# Altium PCB Integrated LED.PcbDoc
Units mm, origin at the board's own origin, x right, y up, seen from the top; angles counter-clockwise.
Board outline 76.2 x 101.6 mm, 4 copper layers (Top Layer, Internal Plane 1, Internal Plane 2, Bottom Layer); 20 components, 30 nets, 85 pads, 11 vias.
Unrouted connection lines stored in the file: 11.
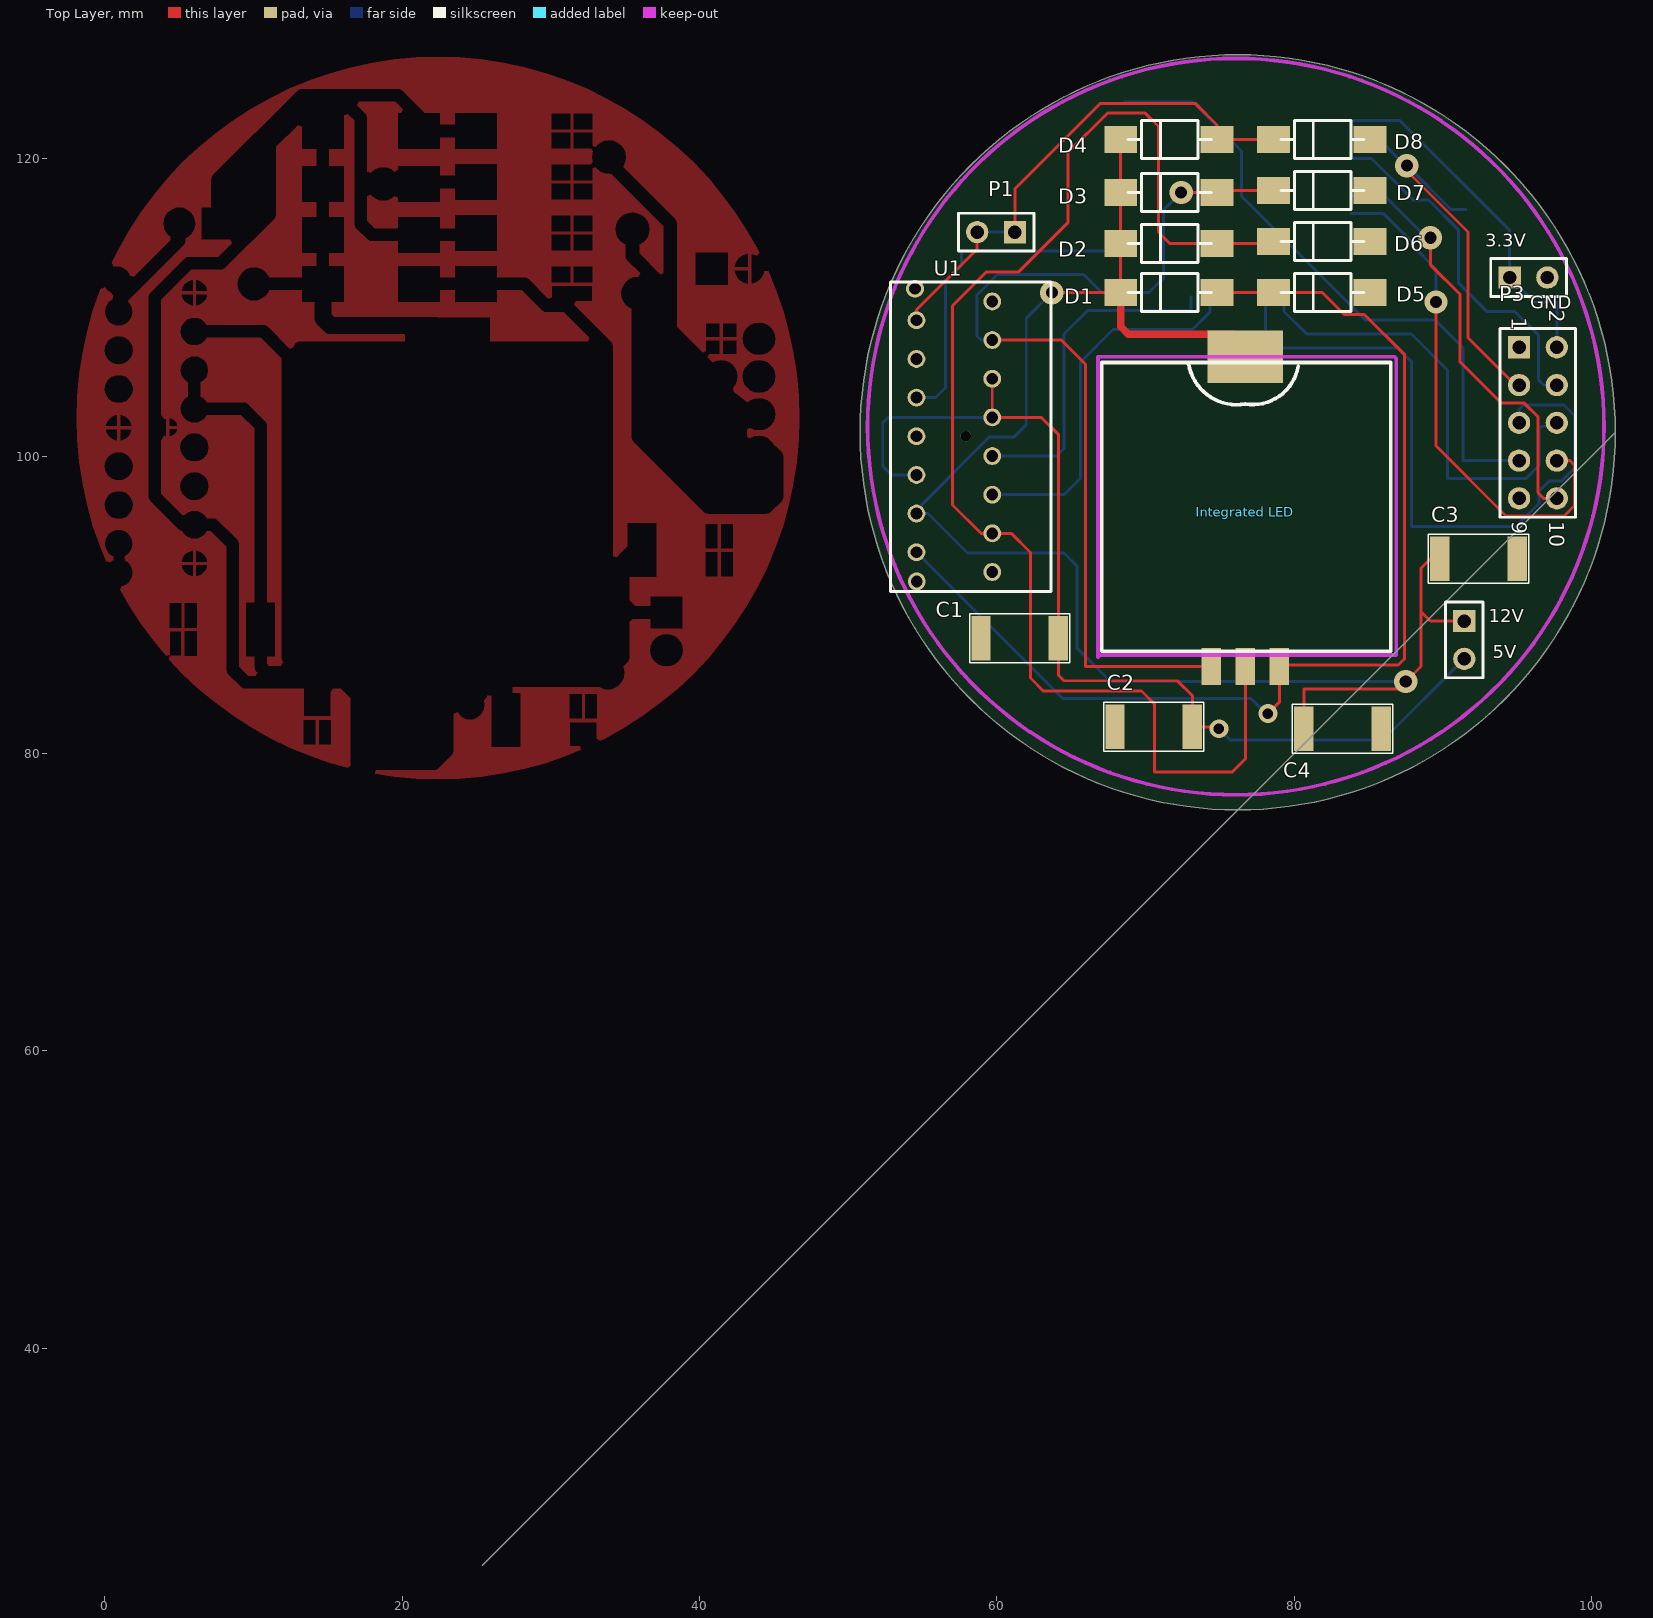
[diagram p0: Top Layer view]
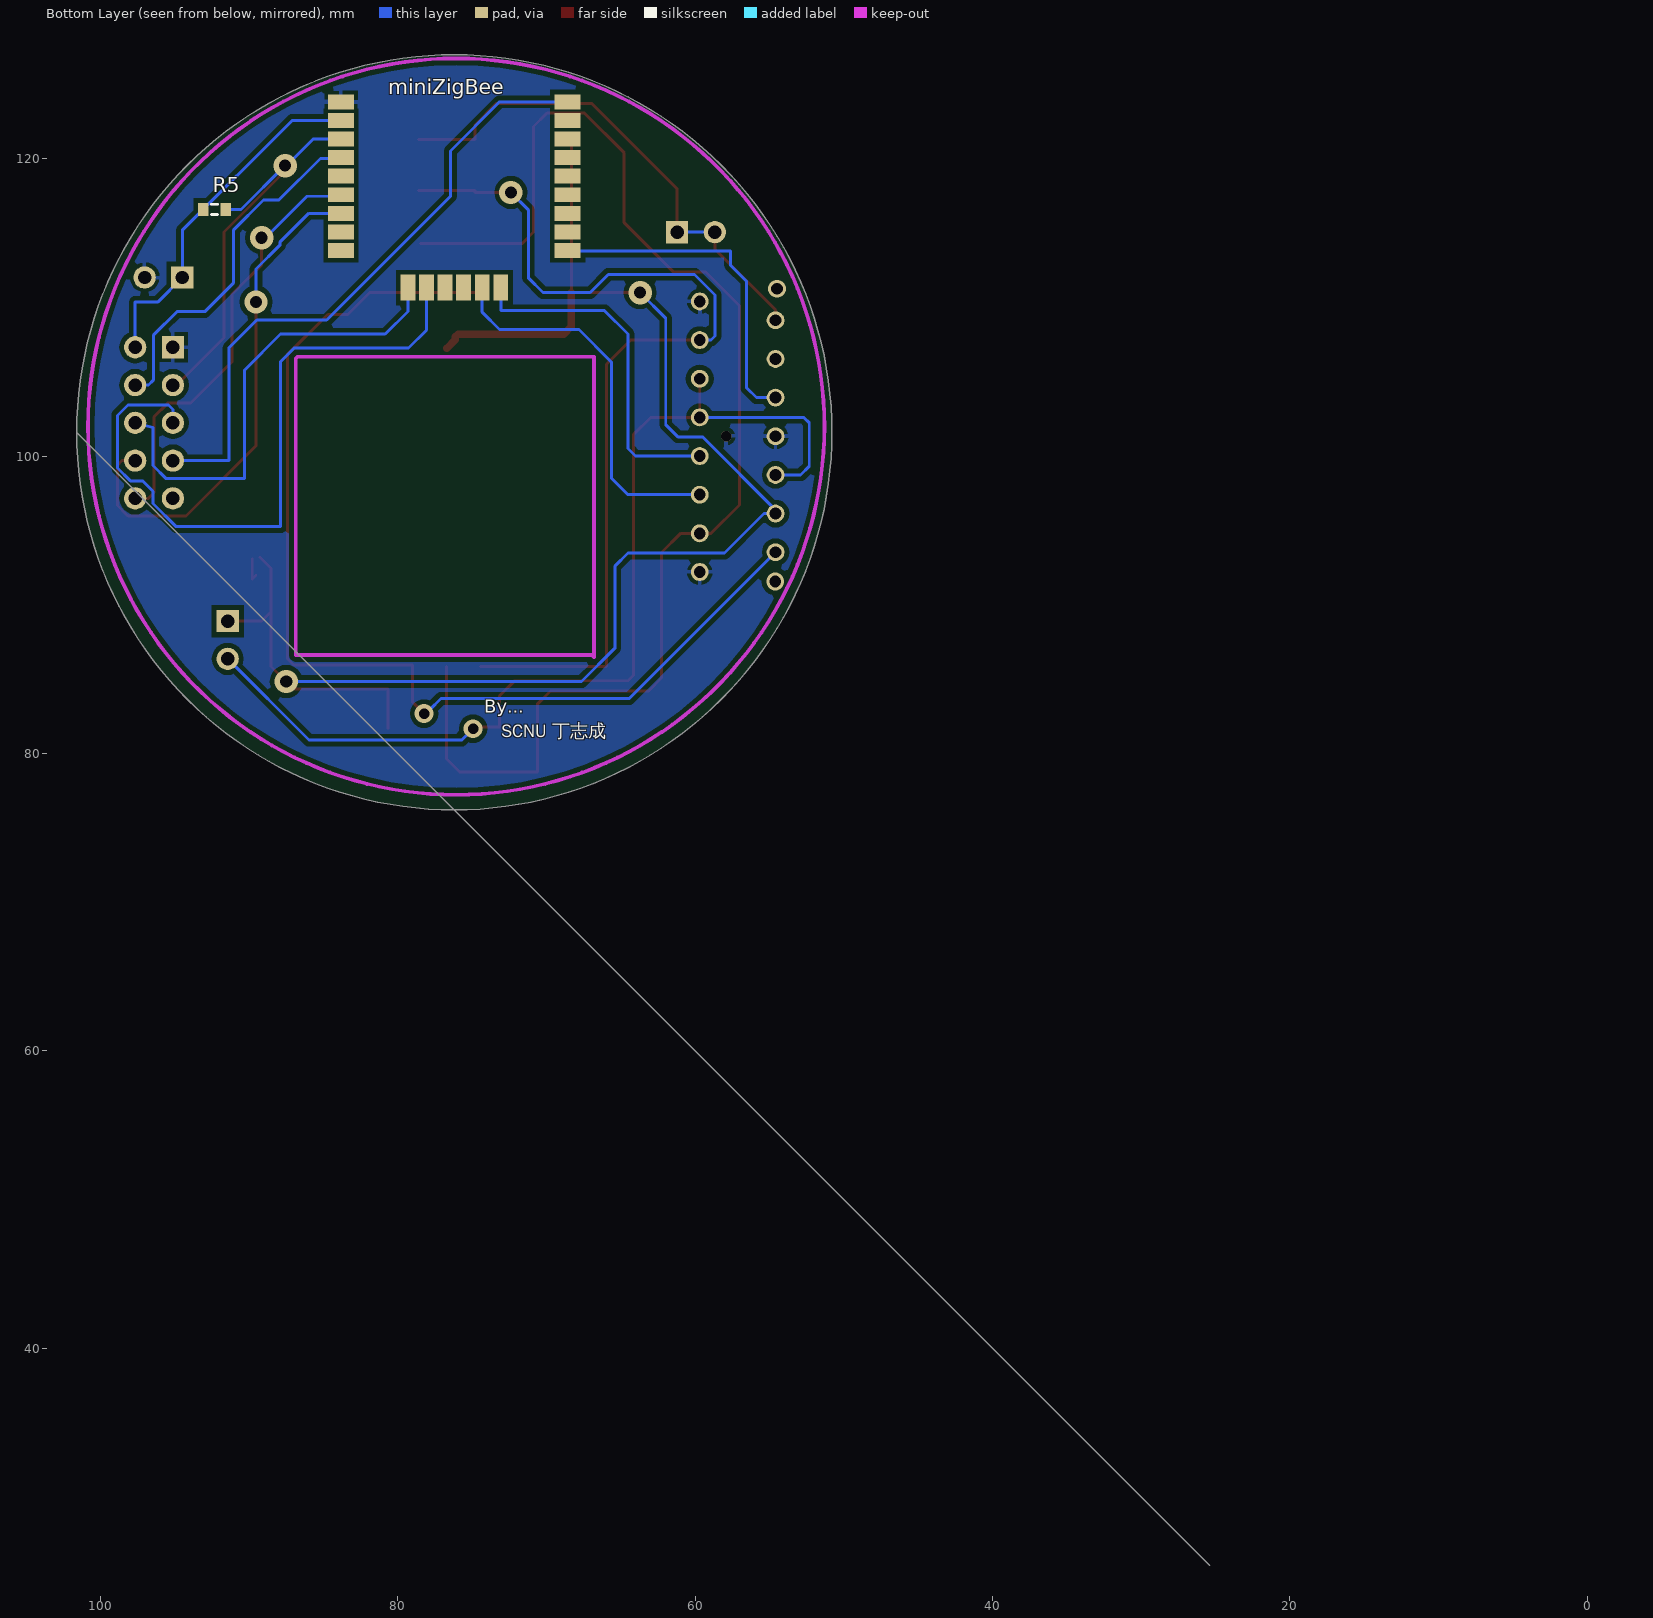
[diagram p1: Bottom Layer view, seen from below]
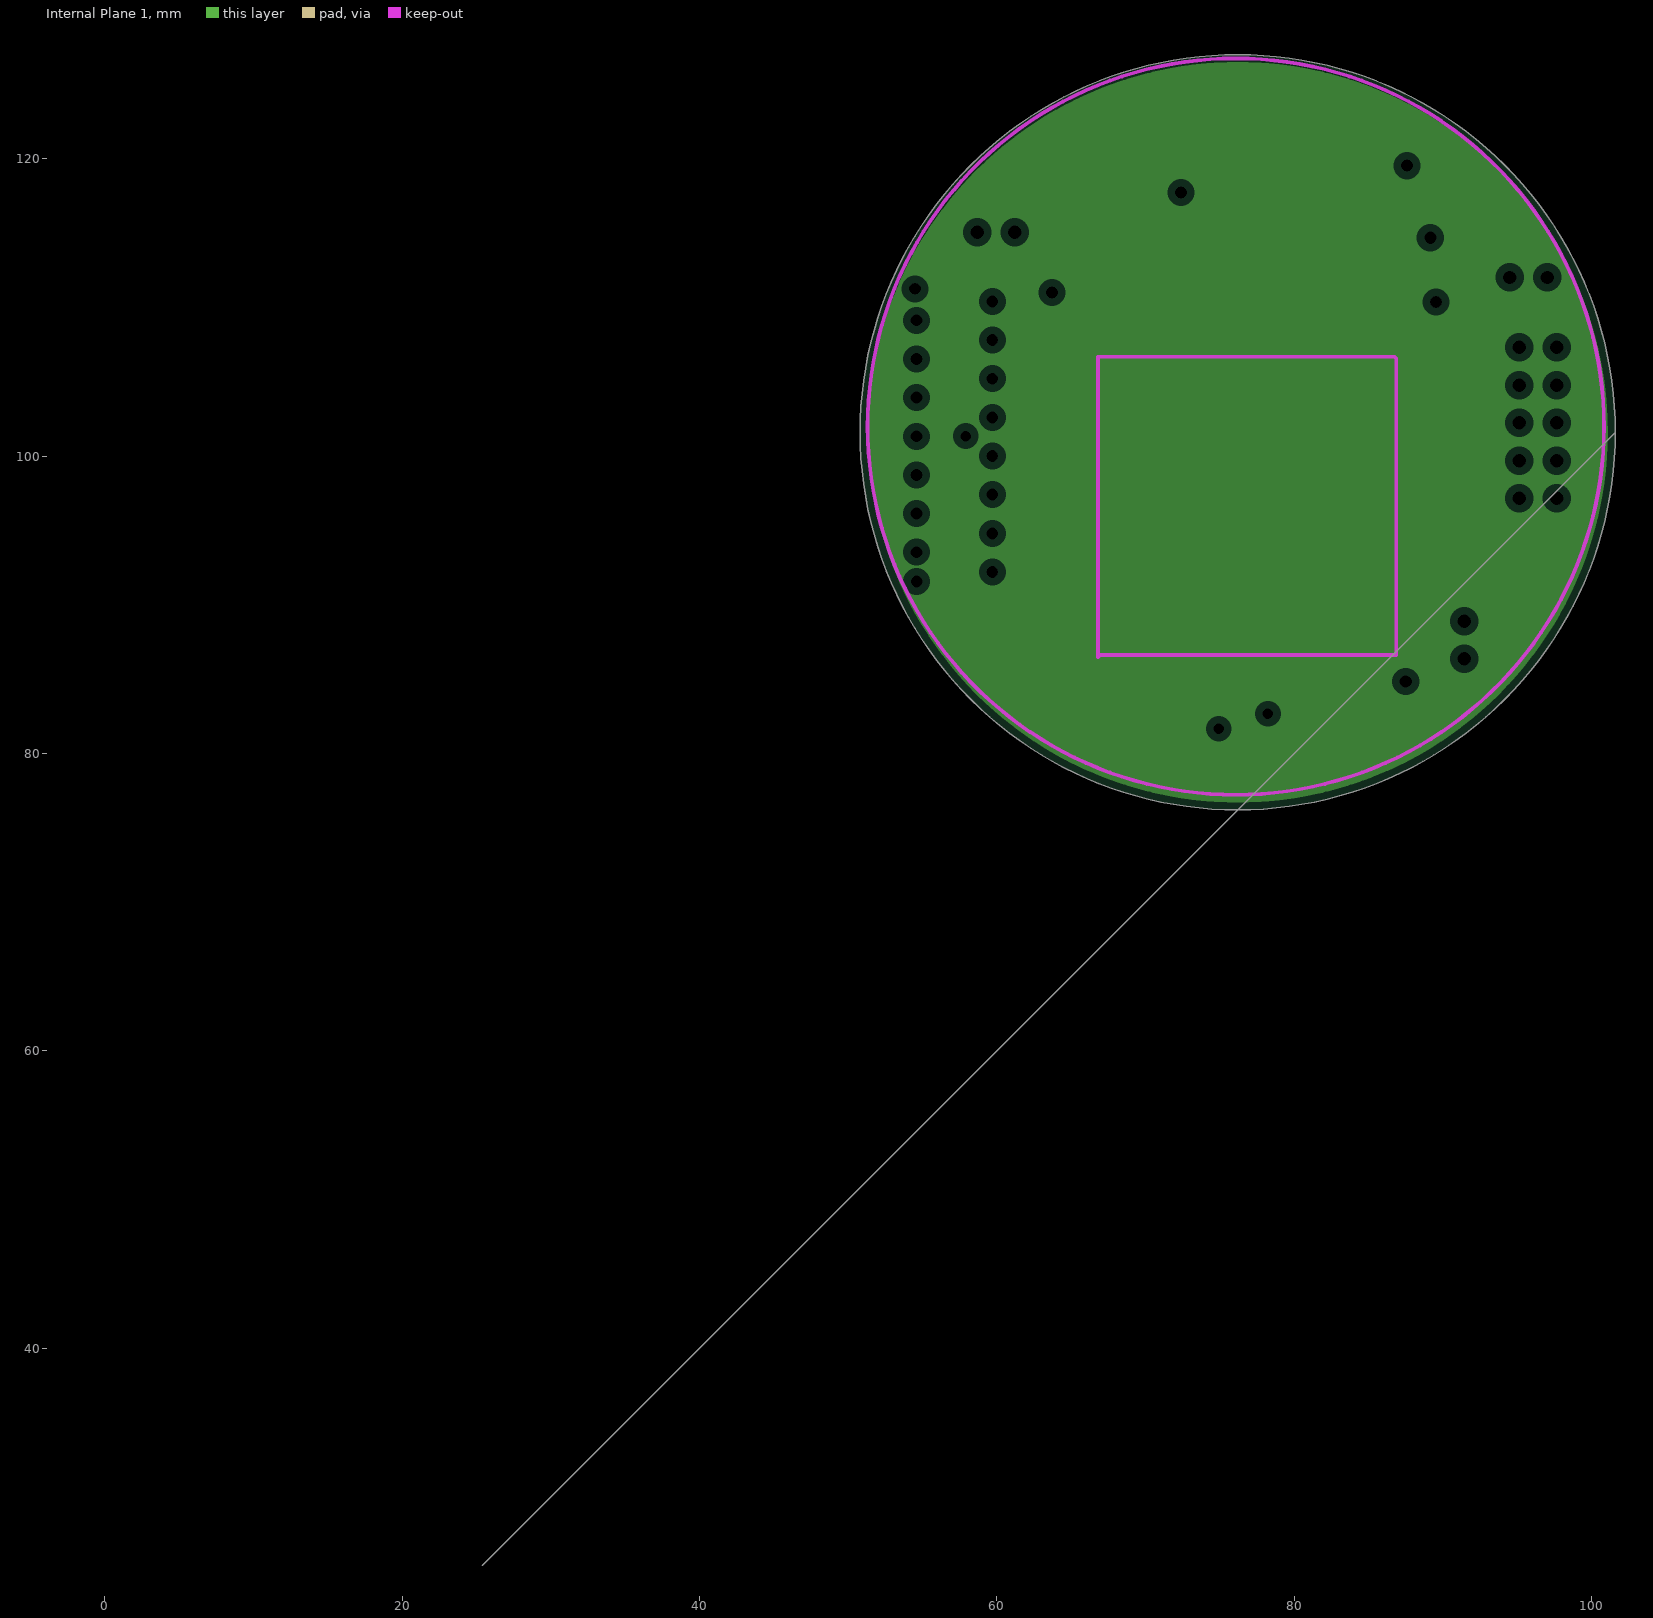
[diagram p2: Internal Plane 1, clearances drawn from the general rule]
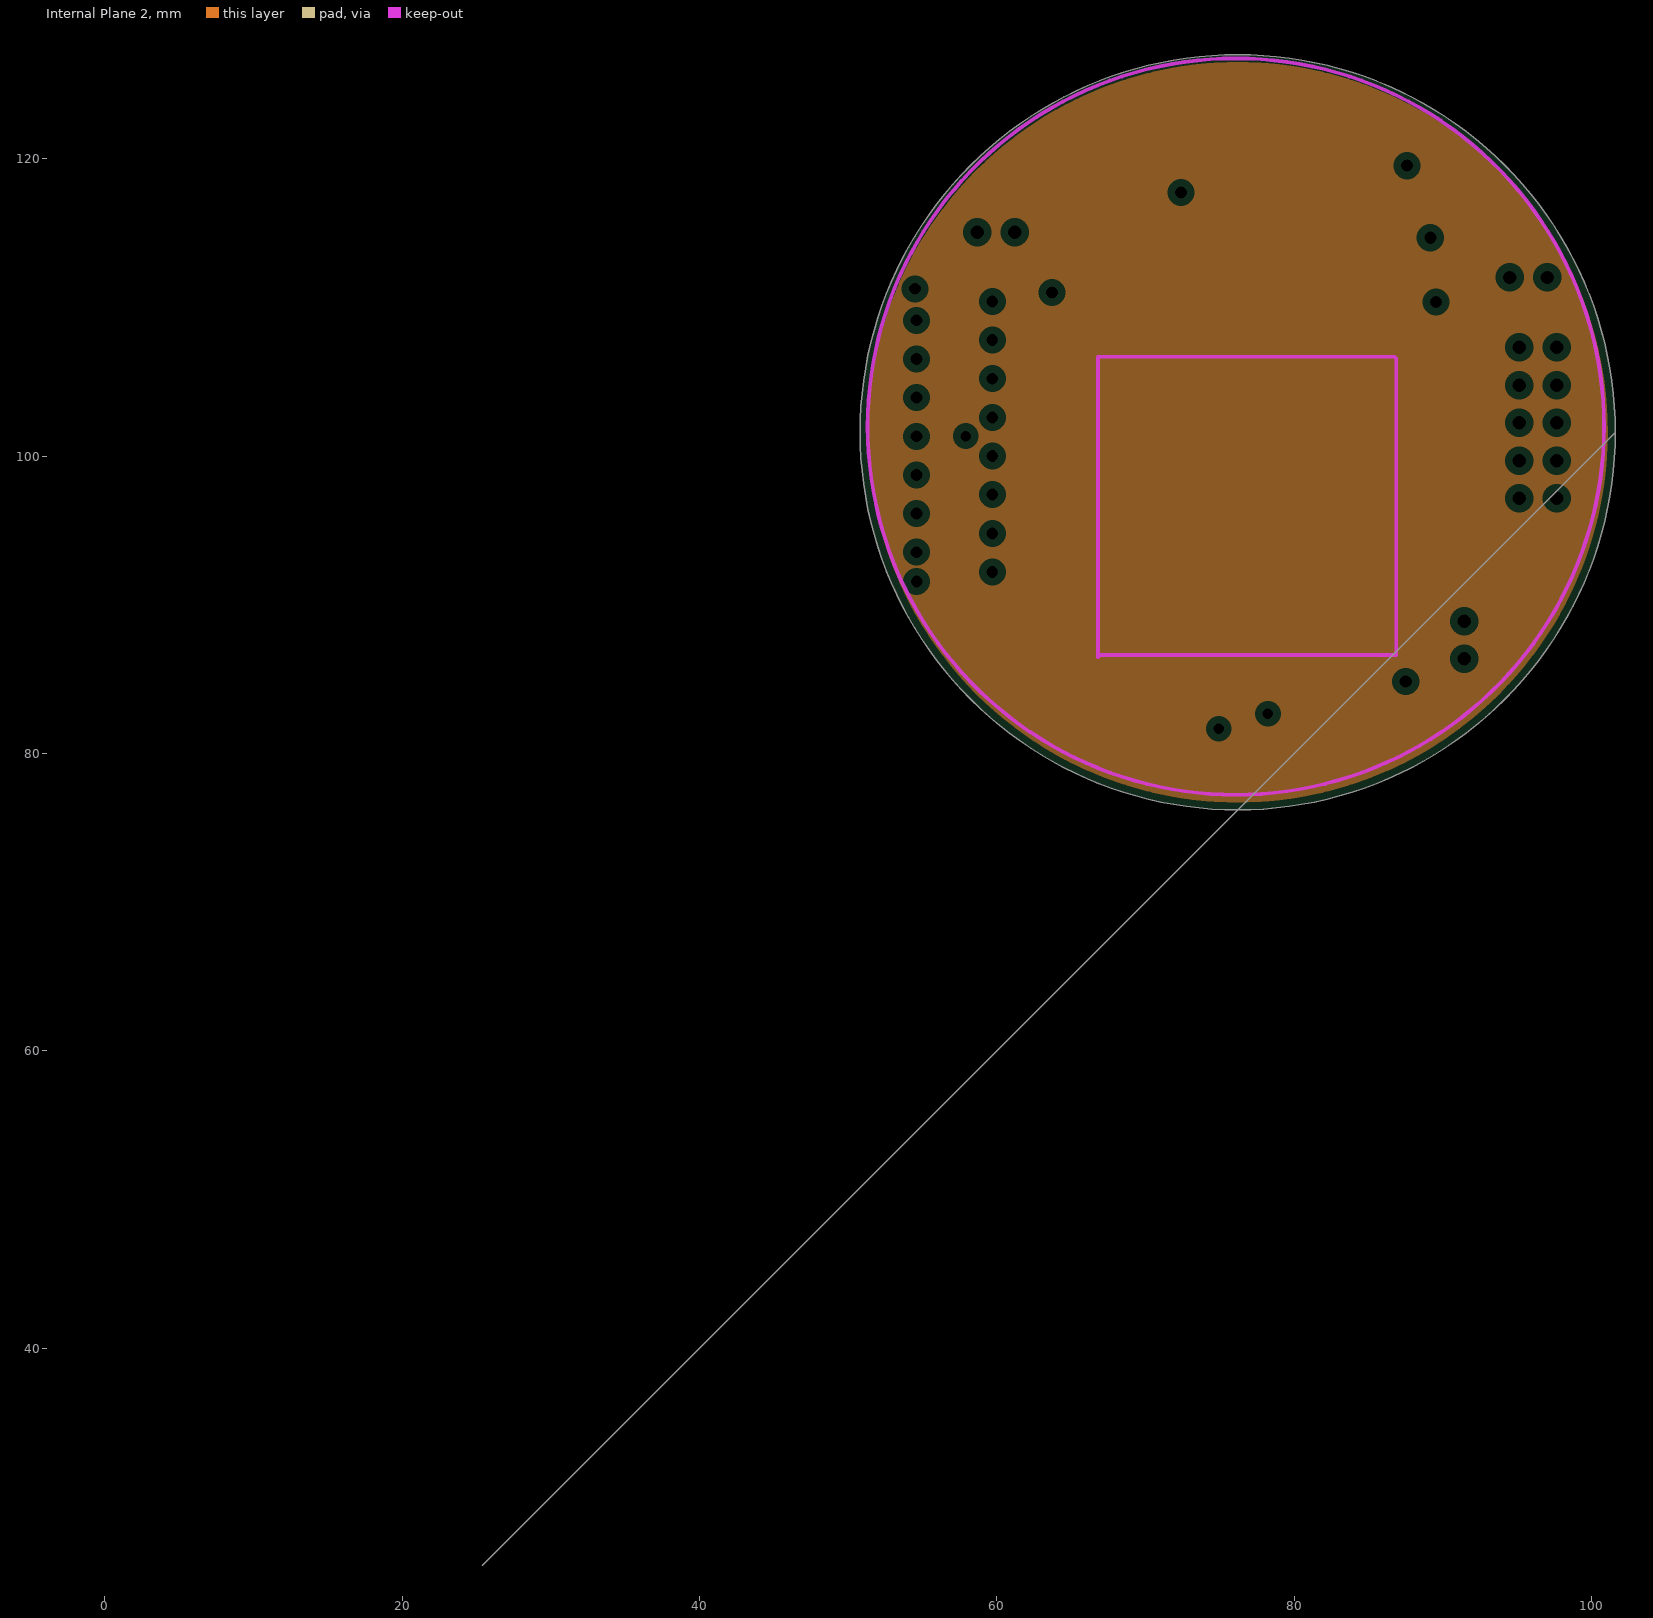
[diagram p3: Internal Plane 2, clearances drawn from the general rule]

## Layer stack, top to bottom
Top Layer: signal copper 0.0356
Dielectric: dielectric 0.32, FR-4, Dk 4.8
Internal Plane 1: plane copper 0.0356
Dielectric: dielectric 0.32, FR-4, Dk 4.8
Internal Plane 2: plane copper 0.0356
Dielectric: dielectric 0.32, FR-4, Dk 4.8
Bottom Layer: signal copper 0.0356

## Board outline
101.6,101.6 ccw(c76.2,101.6) 76.2,127 ccw(c76.2,101.6) 50.8,101.6 ccw(c76.2,101.6) 76.2,76.2 ccw(c76.2,101.6) 25.4,25.4

## Design rules (kind name [scope] priority, off if disabled: settings)
Clearance [All] p1: gap=0.33
PlaneClearance [All] p1: clearance=0.508
PlaneConnect [All] p1: planeconnectstyle=Relief reliefexpansion=0.508 reliefentries=4 reliefconductorwidth=0.254 reliefairgap=0.254
PolygonConnect [All] p1: connectstyle=Relief reliefconductorwidth=0.254 reliefentries=4 polygonreliefangle="90 Angle" airgapwidth=0.254
RoomDefinition "Integrated LED" [InComponentClass('Integrated LED')] p1: confinementstyle=ConfineIn formatcopy=TRUE lockcomponents=FALSE outline 0,0 50.8,0 50.8,25.4 0,25.4
RoutingVias [All] p1: holewidth=0.813 width=1.575 viastyle="Through Hole" minholewidth=0.711 minwidth=1 maxholewidth=0.711 maxwidth=1
SolderMaskExpansion [All] p1: expansion=0.102
Width [All] p1: maxlimit=0.25 minlimit=0.17 preferedwidth=0.2
26 further rules are at their usual default settings.

## Components (designator, comment, footprint, x,y, rotation, side; value= is the part's Value field where it differs from the comment)
3.3V "Header 2" HDR1X2 94.488,112.014 r0 top (schematic designator P2)
12V "Header 2" HDR1X2 91.44,88.9 r270 top (schematic designator P4)
C1 "" PCBComponent_1 64.135,87.757 r180 top
C2 "" PCBComponent_1 73.152,81.788 r180 top
C3 "" PCBComponent_1 89.789,93.091 r0 top
C4 "" PCBComponent_1 80.645,81.661 r0 top
D1 "IN4007" IN4007 74.803,110.998 r180 top
D2 "IN4007" IN4007 74.803,114.3 r180 top
D3 "IN4007" IN4007 74.803,117.729 r180 top
D4 "IN4007" IN4007 74.803,121.285 r180 top
D5 "IN4007" IN4007 85.09,110.998 r180 top
D6 "IN4007" IN4007 85.09,114.427 r180 top
D7 "IN4007" IN4007 85.09,117.856 r180 top
D8 "IN4007" IN4007 85.09,121.285 r180 top
"Integrated LED" "Integrated LED" "Integrated LED" 76.708,106.172 r0 top
miniZigBee "miniZigBee" miniZigBee 83.82,123.825 r180 bottom
P1 "Header 2" HDR1X2 61.214,115.062 r180 top
P3 "Header 5X2" HDR2X5 95.123,107.315 r270 top
R5 "Res3" J1-0603 92.329,116.586 r180 bottom
U1 "L298N" "L298N - duplicate" 59.69,92.202 r180 top

## Footprints (in the part's own frame and the unit in brackets; to place one, negate y for a bottom-side part, rotate by r counter-clockwise, add the part's x,y. Pads: shape width x height; smd on the part's side, far side on the other; paste and mask are expansions set on the pad)
HDR1X2 [mm] "Connector; Header; 2 Position"
  rect 1.5x1.5 hole 0.9: 1(0,0)
  round 1.5 hole 0.9: 2(2.54,0)
  silkscreen extent -1.27,-1.27 3.81,1.27
HDR2X5 [mm] "Connector; Header; 5x2 Position"
  rect 1.5x1.5 hole 0.9: 1(0,0)
  round 1.5 hole 0.9: 2(0,2.54) 3(2.54,0) 4(2.54,2.54) 5(5.08,0) 6(5.08,2.54) 7(7.62,0) 8(7.62,2.54) 9(10.16,0) 10(10.16,2.54)
  silkscreen extent -1.27,-1.27 11.43,3.81
IN4007 [mm]
  rect 2.2x1.8 smd: 1(0,0) 2(6.477,0)
  silkscreen extent 0.38,-1.27 5.97,1.27
"Integrated LED" [mm] "Integrated LED"
  rect 5.08x3.524 smd: 1(0,0.508)
  rect 1.3x2.5 smd: 2(-2.286,-20.32) 3(0,-20.32) 4(2.286,-20.32)
  Keep-Out Layer lines w0.254: -9.906,-19.685 -9.906,0.508 10.033,0.508 10.16,0.381 10.16,-19.558 -9.779,-19.558 -9.906,-19.685
  silkscreen extent -9.65,-19.3 9.78,0.13
J1-0603 [mm] "Chip Resistor, Body 1.6x0.8mm, IPC High Density"
  rect 0.7x0.9 smd: 1(-0.75,0) 2(0.75,0)
  silkscreen extent -0.2,-0.35 0.2,0.35, body extent -0.85,-0.48 0.85,0.48, height 0.9
"L298N - duplicate" [mm]
  round 1.2 hole 0.8: 1(0,0) 2(5.1,-1.33) 3(0,-2.6) 4(5.1,-3.93) 5(0,-5.2) 6(5.1,-6.53) 7(0,-7.8) 8(5.1,-9.13) 9(0,-10.4) 10(5.1,-11.73) 11(0,-13) 12(5.1,-14.33) 13(0,-15.6) 14(5.1,-16.93) 15(0,-18.2)
  silkscreen extent -3.94,-19.5 6.86,1.3
miniZigBee [mm] "miniZigBee"
  rect 1.75x1 smd: 1(0,0) 2(0,-1.25) 3(0,-2.5) 4(0,-3.75) 5(0,-5) 6(0,-6.25) 7(0,-7.5) 8(0,-8.75) 9(0,-10) 16(15.25,-10) 17(15.25,-8.75) 18(15.25,-7.5) 19(15.25,-6.25) 20(15.25,-5) 21(15.25,-3.75) 22(15.25,-2.5) 23(15.25,-1.25) 24(15.25,0)
  rect 1x1.75 smd: 10(4.5,-12.5) 11(5.75,-12.5) 12(7,-12.5) 13(8.25,-12.5) 14(9.5,-12.5) 15(10.75,-12.5)
PCBComponent_1 [mm]
  rect 1.3x3 smd: 1(0,0) 2(5.207,0)
  silkscreen extent -0.76,-1.65 5.97,1.65

## Part data
3.3V 12V P1: "Header, 2-Pin"
C1 C2 C3 C4: library part Cap2, "Capacitor"
P3: "Header, 5-Pin, Dual row"
R5: "Resistor"

## Via types
v1: diameter 1.575, hole 0.813, Top Layer to Bottom Layer, 6 vias
v2: diameter 1.27, hole 0.711, Top Layer to Bottom Layer, 2 vias
v3: diameter 1.2, hole 0.8, Top Layer to Bottom Layer, 2 vias
v4: diameter 0.711, hole 0.711, Top Layer to Bottom Layer, 1 vias

## Nets (pads, with @x,y where several pads share a name; then routed paths per layer and width w, separated by ;. In a path a pad name is that pad's centre, name@x,y a point inside that pad or via, vN(x,y) a via of type N, cw(c..) or ccw(c..) an arc to the next point about the centre after c; other vN are vias at no path point)
5V: 12V.2 | length 19.1
  Top Layer w0.2: v2@74.917,81.619 v2(74.93,81.661)
  Bottom Layer w0.2: v2(74.93,81.661) 75.692,80.899 85.979,80.899 12V.2
12V: 12V.1 | length 3.1
  Top Layer w0.2: 88.582,89.471 89.154,88.9 12V.1
+5V: C1.1 C2.1 U1.6 U1.9 U1.11 | length 50.2
  Top Layer w0.2: U1.11 U1.9 62.992,102.602 64.135,101.459 C1.1 64.135,85.268 64.516,84.887 72.136,84.887 73.152,83.871 C2.1 74.803,81.788 74.93,81.661
  Bottom Layer w0.2: U1.6 52.906,98.732 52.324,99.314 52.324,102.235 52.691,102.602 U1.9
+12V: "Integrated LED.1" C3.1 C4.1 D1.2 D2.2 D3.2 D4.2 U1.4 | length 107.2
  Top Layer w0.2: v1(63.703,110.998) D1.2 D2.2 D3.2 D4.2 ; C4.1 80.645,84.328 86.995,84.328 v1(87.503,84.836) 88.519,85.852 88.519,92.456 C3.1@89.281,93.218 ; C3.1@89.535,91.985 89.789,91.731 C3.1
  Top Layer w0.5: D1.2 68.326,108.712 68.834,108.204 75.946,108.204 76.122,108.028 76.122,107.823 76.708,107.237
  Bottom Layer w0.2: U1.4@54.469,96.252 59.512,101.295 61.163,101.295 61.976,102.108 61.976,109.271 v1(63.703,110.998) ; U1.4 55.372,96.132 58.032,93.472 64.516,93.472 65.405,92.583 65.405,87.071 67.64,84.836 v1(87.503,84.836)
BLUE: "Integrated LED.2" D3.1 D7.2 U1.13 | length 66.3
  Top Layer w0.2: U1.13 64.334,107.802 65.964,106.172 65.964,85.852 74.422,85.852 ; v1(72.39,117.729) D3.1 74.803,117.856 D7.2
  Bottom Layer w0.2: U1.13 58.928,107.802 58.659,108.071 58.659,110.84 60.034,112.216 65.838,112.216 67.056,110.998 70.231,110.998 71.222,111.989 71.222,116.561 v1(72.39,117.729)
GND: 3.3V.2 C1.2 C2.2 C3.2 C4.2 D5.1 D6.1 D7.1 D8.1 miniZigBee.1 P3.1 U1.1 U1.8 U1.15
  other v4: 57.912,101.346
GREEN: "Integrated LED.3" D2.1 D6.2 U1.3 | length 92.1
  Top Layer w0.2: 76.708,85.852 76.708,79.629 75.819,78.74 70.612,78.74 70.612,83.312 69.723,84.201 63.119,84.201 62.255,85.065 62.255,93.507 60.96,94.802 U1.3 58.928,94.802 57.023,96.707 57.023,110.109 59.309,112.395 61.468,112.395 64.77,115.697 64.77,120.396 67.437,123.063 69.977,123.063 70.866,122.174 70.866,115.062 71.628,114.3 D2.1 D6.2@78.486,114.3
P0_0: miniZigBee.23
P0_1: miniZigBee.22
P0_2: miniZigBee.21
P0_3: miniZigBee.20
P0_4: miniZigBee.19
P0_5: miniZigBee.18
P0_6: miniZigBee.17
P0_7: miniZigBee.16 U1.10 | length 22.8
  Bottom Layer w0.2: U1.10 55.88,103.932 56.54,104.592 56.54,111.76 57.633,112.852 57.633,113.792 miniZigBee.16@68.57,113.792
P1_0: miniZigBee.15 U1.7 | length 22.8
  Bottom Layer w0.2: U1.7 64.008,100.002 64.516,100.51 64.516,108.204 66.092,109.78 73.07,109.78 miniZigBee.15@73.07,110.69
P1_1: miniZigBee.14 U1.5 | length 25.3
  Bottom Layer w0.2: U1.5 64.509,97.402 65.634,98.527 65.634,106.324 67.818,108.509 73.152,108.509 74.32,109.677 miniZigBee.14@74.32,110.69
P1_2: miniZigBee.13
P1_3: miniZigBee.12
P1_4: miniZigBee.11 P3.5 | length 45.6
  Bottom Layer w0.2: miniZigBee.11@78.07,110.69 78.07,108.468 79.273,107.264 86.97,107.264 87.884,106.35 87.884,95.25 94.902,95.25 96.469,96.818 96.469,97.63 97.174,98.335 97.987,98.335 98.847,99.195 98.847,102.729 98.146,103.429 95.428,103.429 95.123,103.124 P3.5
P1_5: miniZigBee.10 | length 31.2
  Bottom Layer w0.2: miniZigBee.10@79.32,110.69 79.32,109.728 80.844,108.204 87.884,108.204 90.297,105.791 90.297,98.476 95.58,98.476 96.469,99.365 96.469,101.93 97.663,102.235
P1_6: miniZigBee.7 | length 34.9
  Top Layer w0.2: v1(89.535,110.363) 89.535,100.686 94.249,95.971 98.157,95.971 98.857,96.672 98.857,99.39 98.552,99.695 97.663,99.695
  Bottom Layer w0.2: miniZigBee.7 85.986,116.325 87.936,114.375 87.936,114.177 89.535,112.578 v1(89.535,110.363)
P1_7: miniZigBee.6 | length 29
  Top Layer w0.2: v1(89.154,114.681) 89.154,112.875 91.164,110.865 91.164,106.333 93.941,103.556 95.476,103.556 96.393,102.638 96.393,97.536 96.774,97.155 97.663,97.155
  Bottom Layer w0.2: miniZigBee.6@83.82,117.475 86.106,117.475 88.9,114.681 v1(89.154,114.681)
P2_0: miniZigBee.5
P2_1: miniZigBee.4 | length 24
  Bottom Layer w0.2: miniZigBee.4@83.82,120.015 85.205,120.015 87.999,117.221 89.027,117.221 91.034,115.214 91.034,111.658 92.978,109.714 94.848,109.714 96.444,108.119 96.444,105.105 96.774,104.775 97.663,104.775
P2_2: miniZigBee.3 P3.3 R5.2 | length 27.7
  Top Layer w0.2: v1(87.579,119.532) 87.579,119.177 91.694,115.062 91.694,107.95 94.869,104.775 P3.3
  Bottom Layer w0.2: miniZigBee.3 85.685,121.325 87.478,119.532 v1(87.579,119.532) 87.605,119.532 90.551,116.586 R5.2@91.567,116.586
RED: "Integrated LED.4" D1.1 D5.2 U1.2 | length 74.6
  Top Layer w0.2: D1.1 D5.2 81.89,110.998 83.363,109.525 84.709,109.525 87.426,106.808 87.426,86.38 86.995,85.949 78.994,85.949 78.994,85.852 78.994,83.439 v2(78.232,82.677)
  Bottom Layer w0.2: U1.2 64.429,83.693 77.089,83.693 v2@77.851,82.931
RESET: miniZigBee.24 P3.7 | length 42.8
  Bottom Layer w0.2: miniZigBee.24 73.152,123.825 76.454,120.523 76.454,117.475 84.784,109.145 89.483,109.145 91.364,107.264 91.364,99.695 P3.7
TEST: D4.1 D8.2 P1.1 P1.2 U1.14 | length 34.4
  Top Layer w0.2: U1.14 54.59,109.835 58.674,113.919 P1.2 ; P1.1 61.214,117.983 66.929,123.698 73.381,123.698 74.803,122.276 D4.1 D8.2
  Bottom Layer w0.2: P1.2 P1.1
VCC: 3.3V.1 miniZigBee.2 P3.2 R5.1 | length 23.8
  Bottom Layer w0.2: miniZigBee.2 87.102,122.575 94.488,115.189 3.3V.1 96.151,110.351 97.663,110.351 P3.2
pads on no net: miniZigBee.8 miniZigBee.9 P3.4 P3.6 P3.8 P3.9 P3.10 U1.12
copper on no net:
  other v3: 54.61,91.567 54.483,111.252

## Polygon pours and split planes (outlines as drawn)
GND on Bottom Overlay "Top Layer-No Net" (solid, remove dead copper): 46.355,126.619 48.006,128.27 109.728,128.27
GND on Bottom Layer "Top Layer-No Net" (solid, remove dead copper, pour order 5): 43.18,124.968 44.577,126.365 112.268,126.365 112.268,77.343 107.823,72.898 106.045,74.676 38.227,74.676 38.227,71.501 38.354,71.374
GND on Top Layer "Top Layer-No Net" (solid, remove dead copper, pour order 7): -5.782,130.753 -4.893,131.642 55.305,131.642 55.305,81.858 64.576,72.587 63.306,71.317 -12.767,71.317
no net on Internal Plane 1 (split plane): 233 vertices, not listed, extent 51.308,76.708 101.092,126.492
no net on Internal Plane 2 (split plane): 233 vertices, not listed, extent 51.308,76.708 101.092,126.492

## Keep-outs
Keep-Out Layer:
  circle w0.254: c76.073,101.981 r24.765

## Silkscreen, mask and mechanical layers (free items; w line width, h text height)
Top Overlay:
  text "GND" at 95.885,109.601 h1.52
  text "5V" at 93.345,86.106 h1.52
Bottom Overlay:
  text "By..." at 74.168,82.423 h1.52
  text "SCNU 丁志成" at 73.025,80.772 h1.52

## Dimensions
100.838,101.981 to 51.308,101.981 on Mechanical 1

## Text inside footprints (layer, text, board x,y; h text height)
P3: Top Overlay "2" at 97.155,109.855 h1 r270; Top Overlay "1" at 94.615,109.347 h1 r270; Top Overlay "9" at 94.615,95.631 h1 r270; Top Overlay "10" at 97.155,95.631 h1 r270